# Altium PCB NBP-28 Rev 1.00.PCBDOC (part 5 of 6)
Units mil, origin at the board's own origin, x right, y up, seen from the top; angles counter-clockwise.
Board outline 2716.54 x 3917.15 mil, 8 copper layers (Top Layer, MidLayer3, MidLayer1, VCC, Gnd, VCCINT, MidLayer2, Bottom Layer), stack 59.043 mil thick; 229 components, 429 nets, 1584 pads, 1020 vias.
Unrouted connection lines stored in the file: 302.
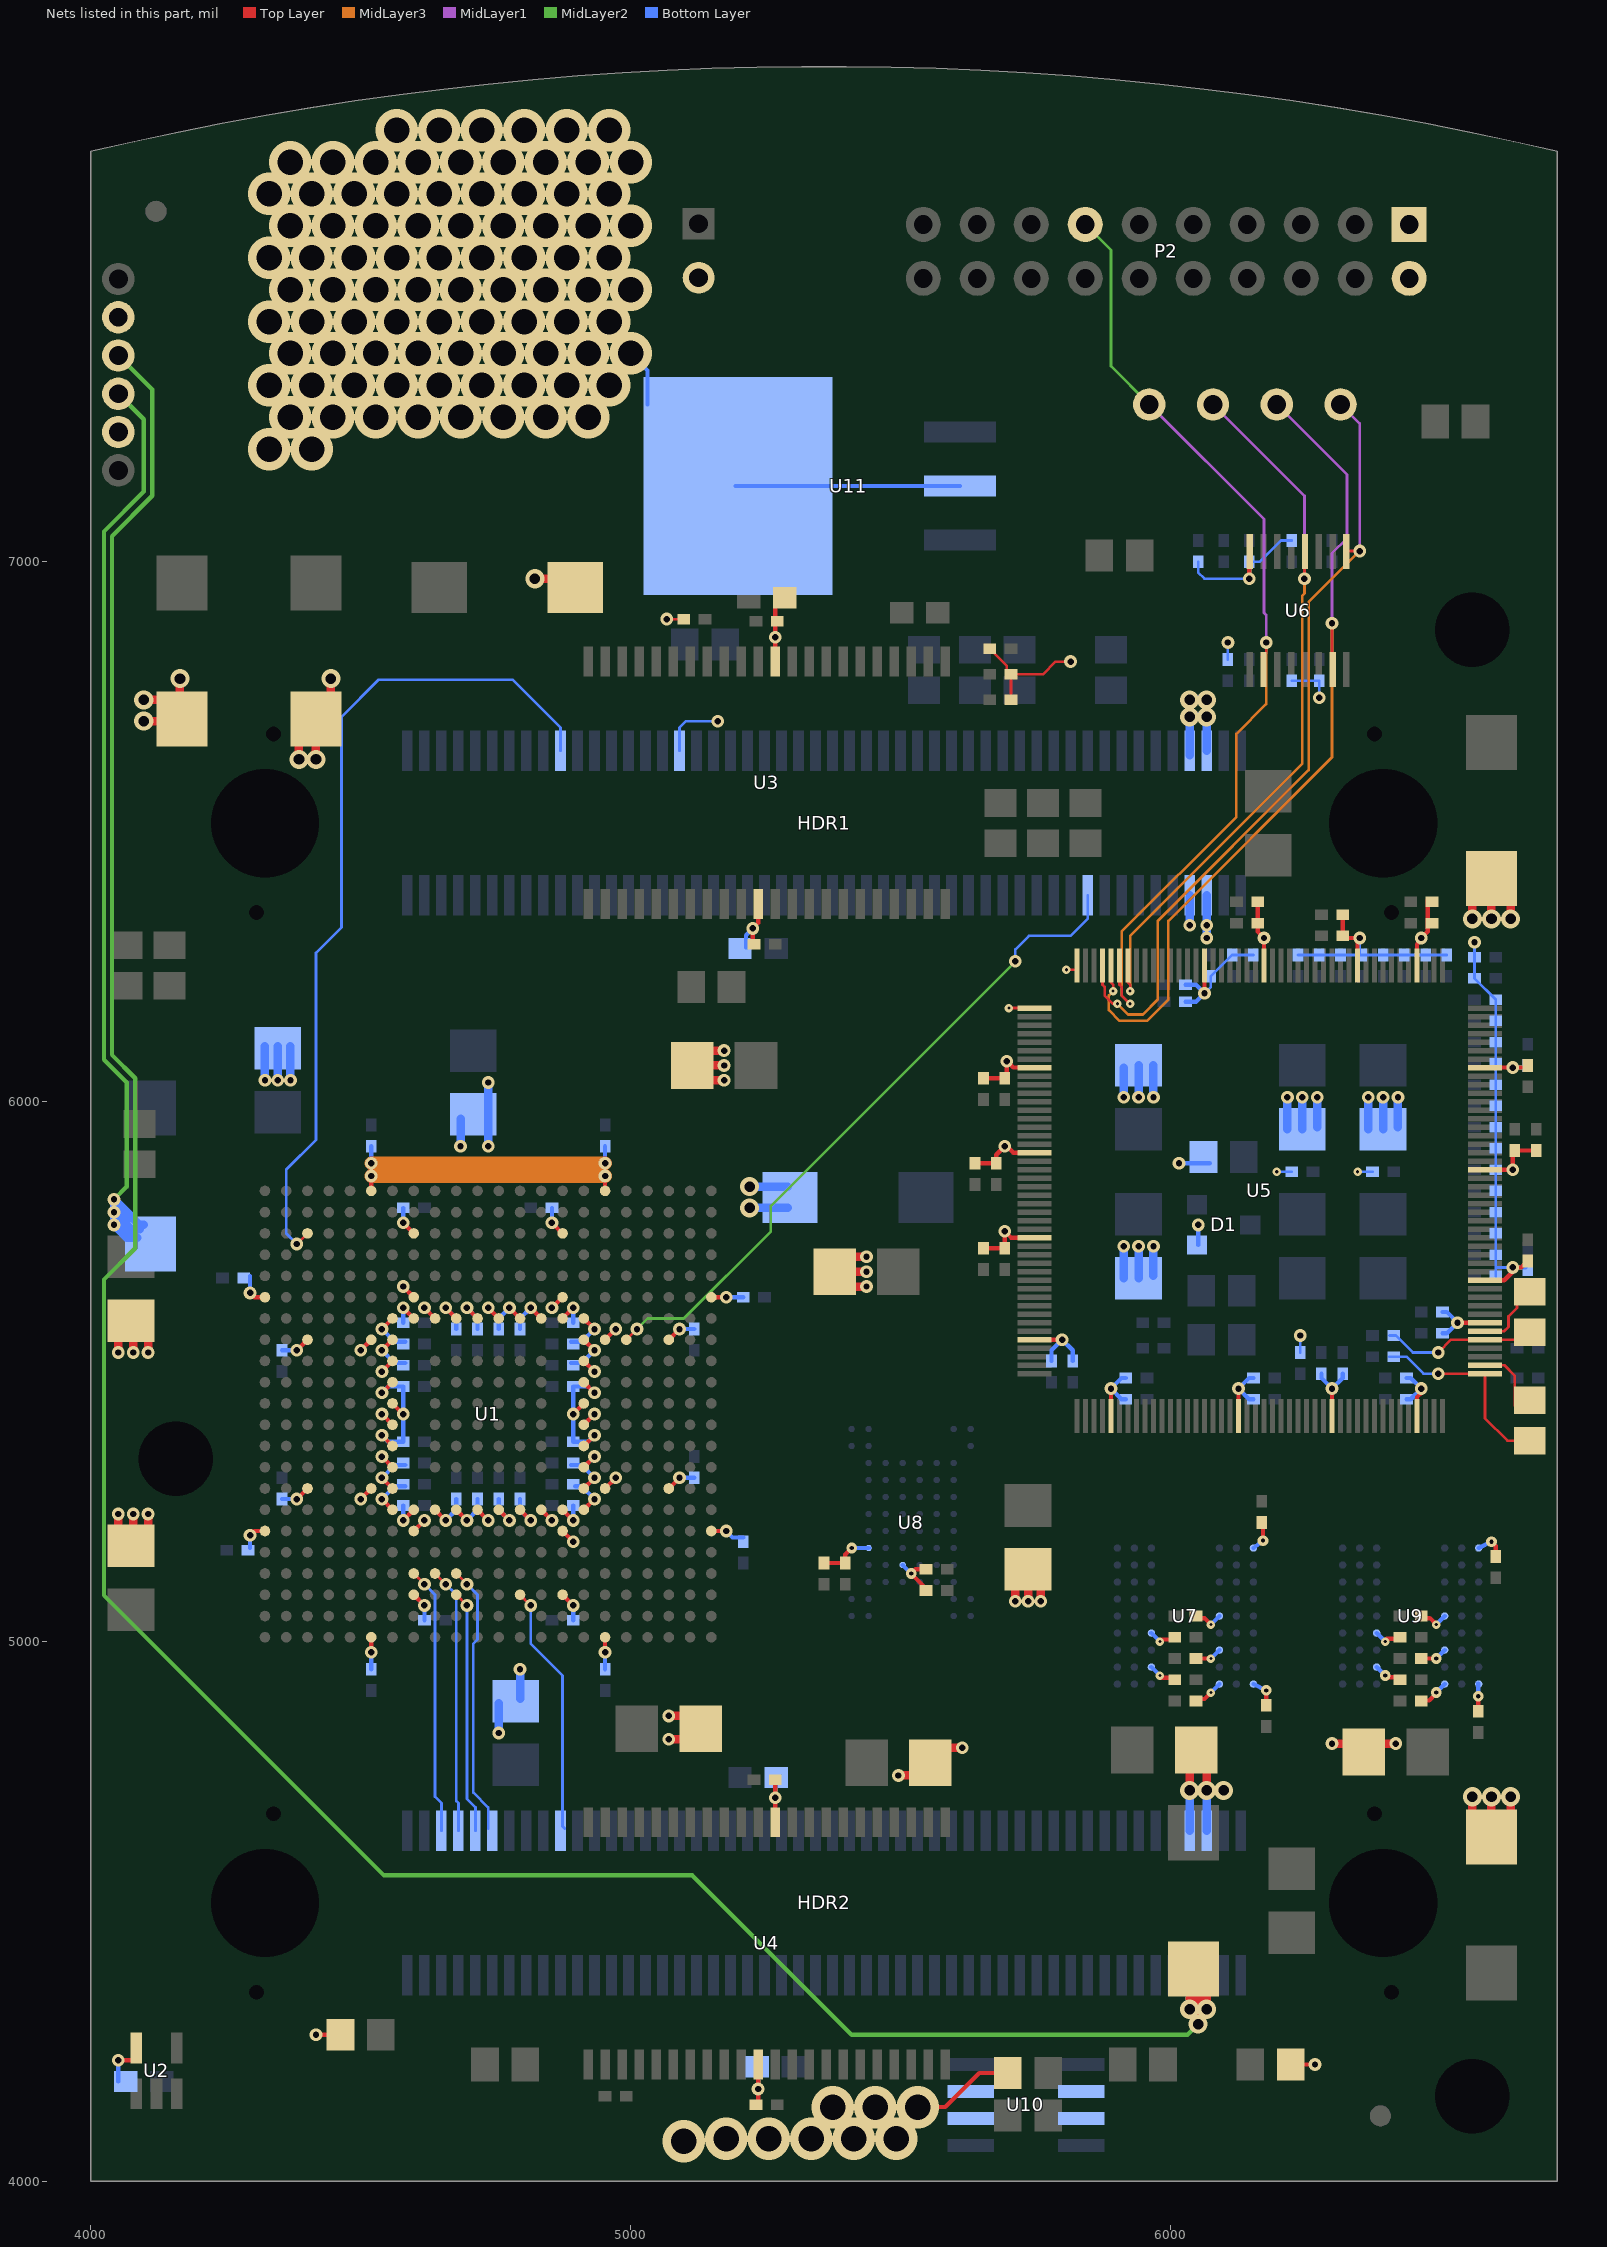
[diagram p11: the nets of this part, all layers, seen from the top]

## Via types
v1: diameter 23.62, hole 11.81, Top Layer to Bottom Layer, 614 vias
v2: diameter 15.75, hole 5.91, Top Layer to Bottom Layer, 214 vias
v3: diameter 78.74, hole 47.24, Top Layer to Bottom Layer, 101 vias
v4: diameter 35.43, hole 19.68, Top Layer to Bottom Layer, 59 vias
v5: diameter 19.68, hole 7.87, Top Layer to Bottom Layer, 32 vias

## Nets (pads, with @x,y where several pads share a name; then routed paths per layer and width w, separated by ;. In a path a pad name is that pad's centre, name@x,y a point inside that pad or via, vN(x,y) a via of type N, cw(c..) or ccw(c..) an arc to the next point about the centre after c; other vN are vias at no path point) (continued)
SWC3: HDR2.6 U1.W8 | length 497.6
  Top Layer w5: U1.W8@4598.43,5125.98 v1(4618.11,5106.3)
  Bottom Layer w5: v1(4618.11,5106.3) 4637.8,5086.61 4637.8,4712.6 4649.61,4700.79 HDR2.6@4649.61,4649.61
SWR0: HDR2.20 U1.Y13 | length 467.3
  Top Layer w5: U1.Y13@4795.28,5086.61 v1(4814.96,5066.93)
  Bottom Layer w5: v1(4814.96,5066.93) 4814.96,4996.06 4874.02,4937.01 4874.02,4657.48 4875.99,4655.51 HDR2.20@4877.95,4653.54
SWR1: HDR2.12 U1.W10 | length 503.4
  Top Layer w5: U1.W10@4677.17,5125.98 v1(4696.85,5106.3)
  Bottom Layer w5: v1(4696.85,5106.3) 4716.54,5086.61 4716.54,5003.94 4708.66,4996.06 4708.66,4720.47 4736.22,4692.91 HDR2.12@4736.22,4653.54
SWR2: HDR2.10 U1.Y10 | length 451.7
  Top Layer w5: U1.Y10@4677.17,5086.61 v1(4696.85,5066.93)
  Bottom Layer w5: v1(4696.85,5066.93) 4696.85,4708.66 4712.6,4692.91 HDR2.10@4712.6,4649.61
SWR3: HDR2.8 U1.W9 | length 494.3
  Top Layer w5: U1.W9@4637.8,5125.98 v1(4657.48,5106.3)
  Bottom Layer w5: v1(4657.48,5106.3) 4677.17,5086.61 4677.17,4704.72 4681.1,4700.79 HDR2.8@4681.1,4649.61
TCLK: TP4.1 U5.173 U6.9 | length 1476.8
  Top Layer w5: U5.173@5874.02,6251.97 5874.02,6216.53 5877.95,6212.6 5877.95,6196.85 5893.7,6181.1 v2(5901.58,6181.1) ; U6.9@6326.77,7019.69 v1(6350.4,7019.69)
  MidLayer1 w5: TP4.1@6314.96,7291.34 6350.4,7255.91 v1(6350.4,7019.69)
  MidLayer3 w5: v2(5901.58,6181.1) 5921.26,6161.42 5948.82,6161.42 5976.38,6188.98 5976.38,6334.65 6255.91,6614.17 6255.91,6925.2 v1(6350.4,7019.69)
TDI: TP6.1 U5.172 U6.7 | length 1600.1
  Top Layer w5: U5.172@5889.77,6251.97 5889.77,6220.47 5893.7,6216.54 v2(5893.7,6204.72) ; U6.7@6299.21,6801.18 v1(6299.21,6885.83)
  MidLayer1 w5: TP6.1@6196.85,7291.34 6326.77,7161.42 6326.77,7043.31 6299.21,7015.75 v1(6299.21,6885.83)
  MidLayer3 w5: v2(5893.7,6204.72) 5885.83,6196.85 5885.83,6169.29 5905.51,6149.61 5956.69,6149.61 5996.06,6188.98 5996.06,6334.65 6299.21,6637.8 v1(6299.21,6885.83)
TDO: P2.13 TP3.1 U5.171 U6.2 | length 1809.7
  Top Layer w5: U5.171@5905.51,6251.97 5905.51,6216.53 5909.45,6212.6 5909.45,6196.85 v2(5925.2,6181.1) ; U6.2@6169.29,6822.84 6177.17,6830.71 v1(6177.17,6850.39)
  MidLayer1 w5: TP3.1@5960.63,7291.34 6173.23,7078.74 6173.23,6905.51 6177.17,6901.58 v1(6177.17,6850.39)
  MidLayer2 w5: P2.13@5842.13,7624.8 5889.77,7577.17 5889.77,7362.21 TP3.1@5960.63,7291.34
  MidLayer3 w5: v2(5925.2,6181.1) 5909.45,6196.85 5909.45,6314.96 6122.05,6527.56 6122.05,6681.1 6177.17,6736.22 v1(6177.17,6850.39)
TEST: HDR1.81 U1.H18 | length 1261.2
  Top Layer w5: U1.H18@4992.13,5559.06 v1(5011.81,5578.74)
  MidLayer2 w5: v1(5011.81,5578.74) 5031.5,5598.43 5098.43,5598.43 5259.84,5759.84 5259.84,5807.09 v1(5712.6,6259.84)
  Bottom Layer w5: v1(5712.6,6259.84) 5712.6,6282.01 5737.57,6306.99 5814.86,6306.99 5846.46,6338.58 HDR1.81@5846.46,6381.89
TMS: TP5.1 U5.170 U6.12 | length 1388.5
  Top Layer w5: U5.170@5921.26,6251.97 5921.26,6220.47 5925.2,6216.54 v2(5925.2,6204.72) ; v1(6248.03,6968.5) U6.12@6248.03,7017.72
  MidLayer1 w5: TP5.1@6078.74,7291.34 6248.03,7122.05 v1(6248.03,6968.5)
  MidLayer3 w5: v2(5925.2,6204.72) 5925.2,6307.09 6244.1,6625.98 6244.1,6937.01 6248.03,6940.95 v1(6248.03,6968.5)
VCC1V2: C16.1 C17.1 C18.1 C19.1 C20.1 C21.1 C22.1 C23.1 C24.1 C25.1 C26.1 C27.1 C28.1 C29.1 C130.1 C131.1 TP9.1 U1.G7 U1.G8 U1.G15 U1.G16 U1.H7 U1.H16 U1.R7 U1.R16 U1.T7 U1.T8 U1.T15 U1.T16 U11.2 U11.4 | length 1927.8
  Top Layer w7.87: v1(4539.37,5263.78) U1.T7@4559.06,5244.09 ; v1(4539.37,5303.15) U1.R7@4559.06,5283.47 ; v1(4539.37,5539.37) U1.H7@4559.06,5559.06 ; v1(4539.37,5578.74) U1.G7@4559.06,5598.43 ; v1(4578.74,5224.41) U1.T8@4598.43,5244.09 ; v1(4578.74,5618.11) U1.G8@4598.43,5598.43 ; U1.T15@4874.02,5244.09 v1(4893.7,5224.41) ; U1.G15@4874.02,5598.43 v1(4893.7,5618.11) ; U1.T16@4913.39,5244.09 v1(4933.07,5263.78) ; U1.R16@4913.39,5283.47 v1(4933.07,5303.15) ; U1.H16@4913.39,5559.06 v1(4933.07,5539.37) ; U1.G16@4913.39,5598.43 v1(4933.07,5578.74)
  Top Layer w15.75: v4(4098.43,6704.72) 4169,6704.72 C130.1@4173.23,6704.72 ; v4(4098.43,6744.1) C130.1@4161.42,6744.1 ; C130.1@4165.36,6716.54 v4(4165.36,6783.47) ; v4(4822.84,6968.5) C131.1@4881.89,6968.5
  Bottom Layer w7.87: v1(4539.37,5263.78) 4562.99,5287.4 4578.74,5287.4 C20.1@4582.68,5287.4 ; v1(4539.37,5303.15) 4562.99,5326.77 4578.74,5326.77 C25.1@4582.68,5326.77 ; v1(4539.37,5539.37) 4562.99,5515.75 4578.74,5515.75 C23.1@4582.68,5515.75 ; v1(4539.37,5578.74) 4562.99,5555.12 4578.74,5555.12 C21.1@4582.68,5555.12 ; v1(4578.74,5224.41) C24.1@4578.74,5251.97 ; C22.1@4578.74,5590.55 v1(4578.74,5618.11) ; C27.1@4889.77,5326.77 4893.7,5326.77 4909.45,5326.77 v1(4933.07,5303.15) ; C29.1@4889.77,5515.75 4893.7,5515.75 4909.45,5515.75 v1(4933.07,5539.37) ; C19.1@4889.77,5555.12 4893.7,5555.12 4909.45,5555.12 v1(4933.07,5578.74) ; v1(4893.7,5224.41) C26.1@4893.7,5251.97 ; C28.1@4893.7,5590.55 v1(4893.7,5618.11) ; C18.1@4897.64,5287.4 4909.45,5287.4 v1(4933.07,5263.78) ; v3(5000,7385.83) 5031.5,7354.33 U11.4@5031.5,7291.34 ; U11.4@5194.49,7140.16 U11.4@5198.82,7140.16 U11.2@5610.24,7140.16
  Bottom Layer w15.75: v1(4685.04,5917.32) C17.1@4685.04,5968.5 ; v1(4736.22,5917.32) 4736.22,5976.38 v1(4736.22,6035.43) ; v1(4755.91,4830.71) C16.1@4755.91,4885.83 ; C16.1@4795.28,4893.7 v1(4795.28,4948.82)
  other v3: 4330.71,7208.66 4409.45,7208.66 4370.08,7267.72 4448.82,7267.72 4527.56,7267.72 4606.3,7267.72 4685.04,7267.72 4763.78,7267.72 4842.52,7267.72 4921.26,7267.72 4330.71,7326.77 4409.45,7326.77 4488.19,7326.77 4566.93,7326.77 4645.67,7326.77 4724.41,7326.77 4803.15,7326.77 4881.89,7326.77 4960.63,7326.77 4370.08,7385.83 4448.82,7385.83 4527.56,7385.83 4606.3,7385.83 4685.04,7385.83 4763.78,7385.83 4842.52,7385.83 4921.26,7385.83 4330.71,7444.88 4409.45,7444.88 4488.19,7444.88 4566.93,7444.88 4645.67,7444.88 4724.41,7444.88 4803.15,7444.88 4881.89,7444.88 4960.63,7444.88 4370.08,7503.94 4448.82,7503.94 4527.56,7503.94 4606.3,7503.94 4685.04,7503.94 4763.78,7503.94 4842.52,7503.94 4921.26,7503.94 5000,7503.94 4330.71,7562.99 4409.45,7562.99 4488.19,7562.99 4566.93,7562.99 4645.67,7562.99 4724.41,7562.99 4803.15,7562.99 4881.89,7562.99 4960.63,7562.99 4370.08,7622.05 4448.82,7622.05 4527.56,7622.05 4606.3,7622.05 4685.04,7622.05 4763.78,7622.05 4842.52,7622.05 4921.26,7622.05 5000,7622.05 4330.71,7681.1 4409.45,7681.1 4488.19,7681.1 4566.93,7681.1 4645.67,7681.1 4724.41,7681.1 4803.15,7681.1 4881.89,7681.1 4960.63,7681.1 4370.08,7740.16 4448.82,7740.16 4527.56,7740.16 4606.3,7740.16 4685.04,7740.16 4763.78,7740.16 4842.52,7740.16 4921.26,7740.16 5000,7740.16 4566.93,7799.21 4645.67,7799.21 4724.41,7799.21 4803.15,7799.21 4881.89,7799.21 4960.63,7799.21
VCC1V8: C88.1 C89.1 C90.1 C91.1 C92.1 C93.1 C94.1 C95.1 C96.1 C97.1 C98.1 C99.1 C100.1 C101.1 C132.1 C133.1 D1.1 HDR1.93 HDR1.95 HDR2.93 HDR2.95 R59.1 TP2.1 U5.40 U5.75 U5.95 U5.113 U5.136 U5.154 | length 6648
  Top Layer w7.87: U5.40@5748.03,5559.06 v1(5799.21,5559.06) ; C95.1@6161.42,6370.08 C96.1@6161.42,6330.71 6161.42,6314.96 v1(6173.23,6303.15) U5.154@6173.23,6251.97 ; U5.75@6299.21,5417.32 v1(6299.21,5468.5) ; U5.136@6456.69,6251.97 6456.69,6291.34 v1@6464.57,6299.21 ; v1(6464.57,6303.15) 6476.38,6314.96 6476.38,6330.71 6476.38,6370.08 C94.1@6476.38,6374.02 ; v1(6531.5,5590.55) U5.95@6582.68,5590.55 ; U5.113@6582.68,5874.02 v1(6633.86,5874.02) C101.1@6633.86,5905.51 ; C101.1@6637.8,5909.45 C93.1@6677.17,5909.45
  Top Layer w15.75: v4(6035.43,4318.9) C132.1@6035.43,4377.95 ; v4(6051.18,4291.34) 6051.18,4318.9 6051.18,4393.64 C132.1@6051.18,4393.7 ; v4(6066.93,4318.9) C132.1@6066.93,4389.76 ; v4(6559.06,6338.58) C133.1@6559.06,6401.58 ; v4(6594.49,6338.58) C133.1@6594.49,6397.64 ; v4(6629.92,6338.58) 6629.92,6413.32 C133.1@6629.92,6413.39
  MidLayer2 w7.87: TP2.1@4051.18,7381.89 4114.17,7318.9 4114.17,7122.05 4039.37,7047.24 4039.37,6086.61 4082.68,6043.31 4082.68,5728.35 4024.68,5670.35 4024.68,5085.55 4543.31,4566.93 5114.17,4566.93 5409.45,4271.65 6031.5,4271.65 v4(6051.18,4291.34)
  Bottom Layer w7.87: C97.1@5779.53,5519.69 5779.53,5539.37 v1(5799.21,5559.06) 5818.9,5539.37 C92.1@5818.9,5519.69 ; 6027.56,5885.83 6061.03,5885.83 R59.1@6072.84,5885.83 ; D1.1@6051.18,5734.25 v1(6051.18,5771.65) ; C98.1@6279.53,5496.06 6279.53,5488.19 v1(6299.21,5468.5) 6318.9,5488.19 C91.1@6318.9,5496.06 ; C99.1@6503.94,5570.87 6511.81,5570.87 v1(6531.5,5590.55) 6511.81,5610.24 C90.1@6503.94,5610.24
  Bottom Layer w15.75: C88.1@5913.39,5673.23 v1(5913.39,5732.28) ; C88.1@5940.95,5673.23 v1(5940.95,5732.28) ; C88.1@5968.51,5677.17 v1(5968.51,5732.28) ; v4(6035.43,4318.9) HDR2.93@6035.44,4381.89 ; v1(6035.43,6326.77) HDR1.93@6035.43,6381.89 ; v4(6066.93,4318.9) HDR2.95@6066.93,4381.89 ; v1(6066.93,6303.15) v1(6066.93,6326.77) HDR1.95@6066.93,6381.89 ; C89.1@6216.54,5948.82 v1(6216.54,6007.87) ; C89.1@6244.1,5948.82 v1(6244.1,6007.87) ; C89.1@6271.65,5952.76 v1(6271.65,6007.87)
  other v1: 6015.75,5885.83
VCC2V5: C2.1 C3.1 C4.1 C5.1 C6.1 C7.1 C8.1 C9.1 C10.1 C11.1 C128.1 C129.1 R64.1 TP7.1 U1.A6 U1.A17 U1.AB6 U1.AB17 U1.F1 U1.F22 U1.U1 U1.U22 U10.2 U10.3 U10.6 U10.7 | length 3938.9
  Top Layer w7.87: v1(4295.28,5196.85) 4303.15,5204.72 U1.U1@4322.84,5204.72 ; v1(4295.28,5645.67) 4303.15,5637.8 U1.F1@4322.84,5637.8 ; v1(4519.69,4980.32) U1.AB6@4519.69,5007.87 ; U1.A6@4519.69,5834.65 v1(4519.69,5862.21) v1(4519.69,5885.83) ; v1(4952.76,4980.32) U1.AB17@4952.76,5007.87 ; U1.A17@4952.76,5834.65 v1(4952.76,5862.21) v1(4952.76,5885.83) ; U1.U22@5149.61,5204.72 v1(5177.17,5204.72) ; U1.F22@5149.61,5637.8 v1(5177.17,5637.8) ; v3(5531.5,4137.8) 5582.68,4137.8 5645.67,4200.79 R64.1@5698.82,4200.79
  Top Layer w15.75: C3.1@4043.31,5173.23 4051.18,5177.17 v1(4051.18,5236.22) ; C3.1@4074.8,5173.23 4076.77,5175.2 4078.74,5177.17 v1(4078.74,5236.22) ; C3.1@4106.3,5173.23 4106.3,5177.17 v1(4106.3,5236.22) ; v1(5070.87,4818.9) C2.1@5129.92,4818.9 ; v1(5070.87,4862.21) C2.1@5125.99,4862.21
  MidLayer2 w7.87: v1(4043.31,5818.9) 4066.93,5842.52 4066.93,6035.43 4024.68,6077.68 4024.68,7056.18 4098.43,7129.92 4098.43,7263.78 TP7.1@4051.18,7311.02
  MidLayer3 w25.59: v1(4519.69,5862.21) v1(4952.76,5862.21) ; v1(4519.69,5885.83) v1(4952.76,5885.83)
  Bottom Layer w7.87: C11.1@4295.28,5173.23 v1(4295.28,5196.85) ; v1(4295.28,5645.67) 4295.28,5673.23 4295.28,5677.17 ; C10.1@4519.69,4948.82 v1(4519.69,4980.32) ; v1(4519.69,5862.21) v1(4519.69,5885.83) C4.1@4519.69,5917.32 ; C5.1@4952.76,4948.82 v1(4952.76,4980.32) ; v1(4952.76,5862.21) v1(4952.76,5885.83) C8.1@4952.76,5917.32 ; v1(5177.17,5204.72) 5188.98,5192.91 C7.1@5208.66,5192.91 ; v1(5177.17,5637.8) C6.1@5208.66,5637.8
  Bottom Layer w15.75: v1(4043.31,5771.65) 4066.93,5748.03 C128.1@4086.62,5748.03 ; C128.1@4066.93,5779.53 4047.25,5799.21 4043.31,5803.15 v1(4043.31,5818.9) 4055.12,5807.09 4090.55,5771.65 C128.1@4098.43,5771.65 ; C128.1@4070.87,5755.91 4049.21,5777.56 4043.31,5783.47 v1(4043.31,5795.28) 4055.12,5783.47 4074.8,5763.78 C128.1@4090.55,5763.78 ; v4(5220.47,5803.15) C129.1@5291.34,5803.15 ; v4(5220.47,5842.52) C129.1@5291.34,5842.52
  other v3: 5098.43,4074.8 5177.17,4078.74 5255.91,4078.74 5334.65,4078.74 5413.39,4078.74 5492.13,4078.74 5374.02,4137.8 5452.76,4137.8
VCC3V3: C1.2 C12.1 C13.1 C14.1 C15.1 C30.1 C31.1 C32.1 C33.1 C34.1 C35.1 C36.1 C37.1 C38.1 C39.1 C40.1 C41.1 C42.1 C43.1 C44.1 C45.1 C46.1 C47.1 C48.1 C49.1 C50.1 C51.1 C52.1 C53.1 C54.1 C55.1 C56.1 C57.1 C58.1 C62.1 C66.1 C67.1 C68.1 C69.1 C70.1 C71.1 C72.1 C73.1 C74.1 C75.1 C76.1 C77.1 C78.1 C79.1 C80.1 C81.1 C82.1 C83.1 C84.1 C85.1 C86.1 C87.1 C102.1 C103.1 C104.1 C105.1 C106.1 C107.1 C108.1 C109.1 C110.1 C111.1 C112.1 C113.1 C114.1 C115.1 C116.1 C117.1 C118.1 C119.1 C120.1 C121.1 C122.1 C126.1 C127.1 HDR1.34 HDR1.94 HDR1.96 HDR2.94 HDR2.96 P1.2 P2.1 P2.2 R1.1 R5.1 R15.2 R16.2 R17.2 R18.2 R20.2 R21.2 R22.2 R23.2 R24.2 R25.2 R26.2 R27.2 R28.2 R29.2 R30.2 R31.2 R32.2 R33.2 R34.2 R35.2 R39.2 R40.2 R41.2 R42.2 R43.2 R45.2 R48.2 R49.2 R50.2 R51.2 R52.2 R53.2 R54.2 R55.2 R56.2 R57.2 R61.1 R62.1 R67.1 TP1.1 U1.C8 U1.C15 U1.F8 U1.F15 U1.G9 U1.G10 U1.G11 U1.G12 U1.G13 U1.G14 U1.H3 U1.H6 U1.H17 U1.H20 U1.J7 U1.J16 U1.K7 U1.K16 U1.L7 U1.L16 U1.M7 U1.M16 U1.N7 U1.N16 U1.P7 U1.P16 U1.R3 U1.R6 U1.R17 U1.R20 U1.T9 U1.T10 U1.T11 U1.T12 U1.T13 U1.T14 U1.U8 U1.U15 U1.Y8 U1.Y15 U2.5 U3.11 U3.33 U4.11 U4.33 U5.1 U5.8 U5.18 U5.28 U5.49 U5.64 U5.85 U5.100 U5.125 U5.143 U5.161 U5.176 U6.16 U7.A7 U7.A9 U7.B3 U7.C7 U7.D3 U7.E7 U7.J9 U8.H7 U8.J5 U9.A7 U9.A9 U9.B3 U9.C7 U9.D3 U9.E7 U9.J9 | length 9463.7
  Top Layer w5: v1(5066.93,6893.7) R17.2@5098.43,6893.7 ; R24.2@5665.36,6838.58 5696.85,6807.09 R15.2@5696.85,6791.34 ; v2(5700.79,6173.23) U5.1@5748.03,6173.23 ; R18.2@5704.73,6744.1 R15.2@5704.73,6791.34 5763.78,6791.34 5787.4,6814.96 v1(5814.96,6814.96) ; v2(5807.09,6244.1) U5.176@5826.77,6244.1
  Top Layer w7.87: v1(4051.18,4224.41) 4084.65,4224.41 U2.5@4090.55,4224.41 ; v1(4381.89,5263.78) U1.R3@4401.58,5283.47 ; v1(4381.89,5539.37) U1.H3@4401.58,5559.06 ; v1(4417.32,4271.65) R16.2@4462.6,4271.65 ; v1(4500,5263.78) U1.R6@4519.69,5283.47 ; v1(4500,5539.37) U1.H6@4519.69,5559.06 ; v1(4539.37,5342.52) U1.P7@4559.06,5322.84 ; v1(4539.37,5381.89) U1.N7@4559.06,5362.21 ; v1(4539.37,5421.26) U1.M7@4559.06,5401.58 ; v1(4539.37,5460.63) U1.K7@4559.06,5480.32 ; v1(4539.37,5500) U1.J7@4559.06,5519.69 ; U1.L7@4559.06,5440.95 v1(4578.74,5421.26) ; v1(4578.74,5657.48) U1.F8@4598.43,5637.8 ; v1(4578.74,5775.59) U1.C8@4598.43,5755.91 ; U1.Y8@4598.43,5086.61 v1(4618.11,5066.93) ; U1.U8@4598.43,5204.72 v1(4618.11,5224.41) ; v1(4618.11,5618.11) U1.G9@4637.8,5598.43 ; U1.T9@4637.8,5244.09 v1(4657.48,5224.41) ; v1(4657.48,5618.11) U1.G10@4677.17,5598.43 ; U1.T10@4677.17,5244.09 v1(4696.85,5224.41) ; v1(4696.85,5618.11) U1.G11@4716.54,5598.43 ; U1.T11@4716.54,5244.09 v1(4736.22,5224.41) ; v1(4736.22,5618.11) U1.G12@4755.91,5598.43 ; U1.T12@4755.91,5244.09 v1(4775.59,5224.41) ; v1(4775.59,5618.11) U1.G13@4795.28,5598.43 ; U1.T13@4795.28,5244.09 v1(4814.96,5224.41) ; v1(4814.96,5618.11) U1.G14@4834.65,5598.43 ; U1.T14@4834.65,5244.09 v1(4854.33,5224.41) ; v1(4854.33,5618.11) U1.F15@4874.02,5637.8 ; v1(4854.33,5775.59) U1.C15@4874.02,5755.91 ; U1.Y15@4874.02,5086.61 v1(4893.7,5066.93) ; U1.U15@4874.02,5204.72 v1(4893.7,5185.04) ; v1(4893.7,5421.26) U1.L16@4913.39,5440.95 ; U1.P16@4913.39,5322.84 v1(4933.07,5342.52) ; U1.N16@4913.39,5362.21 v1(4933.07,5381.89) ; U1.M16@4913.39,5401.58 v1(4933.07,5421.26) ; U1.K16@4913.39,5480.32 v1(4933.07,5460.63) ; U1.J16@4913.39,5519.69 v1(4933.07,5500) ; U1.R17@4952.76,5283.47 v1@4972.44,5303.15 ; U1.H17@4952.76,5559.06 v1(4972.44,5578.74) ; U1.R20@5070.87,5283.47 v1(5090.55,5303.15) ; U1.H20@5070.87,5559.06 v1(5090.55,5578.74) ; C53.1@5228.35,6291.34 5226.38,6293.31 v1(5226.38,6320.87) 5236.22,6330.71 U3.11@5236.22,6366.14 ; C58.1@5236.22,4145.67 v1(5236.22,4171.26) U4.11@5236.22,4216.54 U4.11@5236.22,4221.46 ; U4.33@5267.72,4660.43 U4.33@5267.72,4665.35 v1(5267.72,4710.63) C57.1@5267.72,4744.1 ; U3.33@5267.72,6810.04 U3.33@5267.72,6814.96 v1(5267.72,6860.24) 5267.72,6889.76 5267.72,6933.07 C51.1@5267.72,6944.88 ; C105.1@5358.27,5145.67 C104.1@5397.64,5145.67 5397.64,5161.42 v5(5409.45,5173.23) ; C103.1@5547.25,5094.49 5547.25,5098.43 v5(5519.69,5125.98) 5527.56,5133.86 C106.1@5547.25,5133.86 ; C71.1@5637.8,5885.83 C81.1@5677.17,5885.83 5677.17,5901.58 v1(5692.91,5917.32) 5696.85,5917.32 5708.66,5905.51 U5.18@5748.03,5905.51 ; C70.1@5653.54,5728.35 C80.1@5692.91,5728.35 v1(5692.91,5759.84) 5704.73,5748.03 U5.28@5748.03,5748.03 ; C68.1@5653.54,6043.31 C78.1@5692.91,6043.31 ; C78.1@5696.85,6047.24 v1(5696.85,6074.8) 5708.66,6062.99 U5.8@5748.03,6062.99 ; U5.49@5889.77,5417.32 v1(5889.77,5468.5) ; v2(5980.32,4937.01) 5984.25,4933.07 6007.88,4933.07 C119.1@6011.81,4933.07 ; v2(5980.32,5000) 5984.25,5003.94 C121.1@6003.94,5003.94 ; C120.1@6043.31,4893.7 6047.25,4893.7 6062.99,4893.7 v2(6074.8,4905.51) ; C109.1@6043.31,5043.31 6047.25,5043.31 6062.99,5043.31 v2(6074.8,5031.5) ; C118.1@6047.25,4968.5 v2(6074.8,4968.5) ; v1(6062.99,6200.79) U5.161@6062.99,6251.97 ; U5.64@6125.99,5417.32 v1(6125.99,5468.5) ; v1(6145.67,6968.5) U6.16@6145.67,7017.72 ; v5(6171.26,5187.01) C122.1@6171.26,5218.5 ; C108.1@6177.17,4885.83 v5(6177.17,4909.45) ; R5.1@6222.44,4216.54 v1(6267.72,4216.54) ; C86.1@6318.9,6307.09 C76.1@6318.9,6346.46 ; C86.1@6322.84,6303.15 v1(6350.4,6303.15) ; U5.143@6346.46,6251.97 v1@6346.46,6299.21 ; v5@6396.65,4938.01 v5(6397.64,4937.01) 6400.58,4934.07 6425.2,4934.07 C115.1@6428.14,4934.07 ; v2@6396.64,5001 6400.58,5004.94 C116.1@6420.27,5004.94 ; U5.85@6456.69,5417.32 6456.69,5452.76 6464.57,5460.63 v1(6464.57,5468.5) ; C117.1@6459.64,4890.76 6464.57,4890.76 6479.32,4890.76 v5@6491.14,4902.58 ; C107.1@6460.63,5043.31 6464.57,5043.31 6480.32,5043.31 v2(6492.13,5031.5) ; C112.1@6464.57,4968.5 v5(6492.13,4968.5) ; C114.1@6569.88,4871.08 v5(6569.88,4898.64) ; U5.100@6582.68,5669.29 6618.11,5669.29 6633.86,5685.04 v1(6633.86,5692.91) 6649.61,5692.91 C84.1@6661.42,5704.72 ; U5.125@6582.68,6062.99 v1(6633.86,6062.99) C75.1@6657.48,6062.99 ; v5(6594.49,5185.04) 6602.36,5177.17 C113.1@6602.36,5157.48
  Top Layer w15.75: C32.1@4043.31,5598.43 4051.18,5594.49 v1(4051.18,5535.43) ; C32.1@4074.8,5598.43 4076.77,5596.46 4078.74,5594.49 v1(4078.74,5535.43) ; v1(4106.3,5535.43) 4106.3,5594.49 C32.1@4106.3,5598.43 ; v4(4385.83,6633.86) C127.1@4385.83,6696.85 ; v4(4417.32,6633.86) C127.1@4417.32,6692.91 ; C127.1@4444.88,6720.47 v4(4444.88,6783.47) ; C49.1@5110.24,6039.37 5114.17,6039.37 v1(5173.23,6039.37) ; C49.1@5110.24,6094.49 5114.17,6094.49 v1(5173.23,6094.49) ; C49.1@5114.17,6066.93 v1(5173.23,6066.93) ; C31.1@5374.02,5657.48 5377.95,5657.48 v1(5437.01,5657.48) ; C31.1@5374.02,5712.6 5377.95,5712.6 v1(5437.01,5712.6) ; C31.1@5377.95,5685.04 v1(5437.01,5685.04) ; v1(5496.06,4751.97) C50.1@5547.25,4751.97 ; C50.1@5551.18,4803.15 5555.12,4803.15 v1(5614.17,4803.15) ; v1(5712.6,5074.8) C102.1@5712.6,5118.11 ; v1(5736.22,5074.8) C102.1@5736.22,5125.98 ; v1(5759.84,5074.8) C102.1@5759.84,5122.05 ; v4(6035.43,4724.41) C110.1@6035.43,4783.47 ; C110.1@6047.25,4799.21 6066.93,4779.53 v4(6066.93,4724.41) ; v1(6299.21,4811.02) 6358.27,4811.02 v1(6417.32,4811.02) ; C126.1@6559.06,4669.29 v4(6559.06,4712.6) ; C126.1@6594.49,4637.8 6594.49,4637.86 v4(6594.49,4712.6) ; C126.1@6629.92,4653.54 v4(6629.92,4712.6)
  Bottom Layer w5: HDR1.34@5090.55,6649.61 5090.55,6692.91 5102.36,6704.72 v1(5161.42,6704.72) ; R67.1@6051.18,7000 6051.18,6980.32 6062.99,6968.5 v1(6145.67,6968.5) ; v1(6062.99,6200.79) 6074.8,6212.6 R56.2@6074.8,6232.28 R55.2@6114.17,6271.65 R54.2@6153.54,6271.65 ; R57.2@6106.3,6818.9 v1(6106.3,6850.39) ; C62.1@6145.67,7000 6165.36,7000 6204.73,7039.37 R62.1@6224.41,7039.37 ; v2(6196.85,5870.08) R29.2@6224.41,5870.08 ; R1.1@6224.41,6779.53 R61.1@6275.59,6779.53 v1(6275.59,6748.03) ; R52.2@6236.22,6271.65 R53.2@6275.59,6271.65 R50.2@6314.96,6271.65 R51.2@6350.4,6271.65 ; R20.2@6240.16,5535.43 v1(6240.16,5566.93) ; v2(6346.46,5870.08) R30.2@6374.02,5870.08 ; v1(6350.4,6303.15) R51.2@6350.4,6271.65 ; R41.2@6511.81,6271.65 R42.2@6472.44,6271.65 R43.2@6433.07,6271.65 R45.2@6393.7,6271.65 R51.2@6354.33,6271.65 R51.2@6350.4,6271.65 ; v1(6562.99,6295.28) R49.2@6562.99,6267.72 R40.2@6562.99,6228.35 R48.2@6602.36,6188.98 R39.2@6602.36,6149.61 R25.2@6602.36,6110.24 R26.2@6602.36,6070.87 R27.2@6602.36,6031.5 R28.2@6602.36,5992.13 R31.2@6602.36,5952.76 R32.2@6602.36,5913.39 R35.2@6602.36,5874.02 R33.2@6602.36,5834.65 R34.2@6602.36,5795.28 R21.2@6602.36,5755.91 R22.2@6602.36,5716.54 6602.36,5692.91 ; R23.2@6602.36,5677.17 6602.36,5692.91 ; R26.2@6606.3,6062.99 v1(6633.86,6062.99) ; v1(6633.86,5692.91) 6602.36,5692.91
  Bottom Layer w7.87: C1.2@4051.18,4185.04 v1(4051.18,4224.41) ; C15.1@4354.33,5263.78 v1(4381.89,5263.78) ; C47.1@4354.33,5539.37 v1(4381.89,5539.37) ; v1(4539.37,5381.89) 4551.18,5370.08 C33.1@4578.74,5370.08 v1(4578.74,5421.26) C40.1@4578.74,5472.44 4551.18,5472.44 v1(4539.37,5460.63) ; v1(4578.74,5775.59) C14.1@4578.74,5803.15 ; C48.1@4618.11,5039.37 v1(4618.11,5066.93) ; v1(4657.48,5224.41) 4677.17,5244.1 C36.1@4677.17,5263.78 ; v1(4657.48,5618.11) 4677.17,5598.43 C39.1@4677.17,5578.74 ; v1(4696.85,5224.41) 4716.54,5244.1 C44.1@4716.54,5263.78 ; v1(4696.85,5618.11) 4716.54,5598.43 C41.1@4716.54,5578.74 ; C34.1@4755.91,5263.78 4755.91,5244.1 v1(4775.59,5224.41) ; C37.1@4755.91,5578.74 4755.91,5598.43 v1(4775.59,5618.11) ; C43.1@4795.28,5263.78 4795.28,5244.1 v1(4814.96,5224.41) ; C35.1@4795.28,5578.74 4795.28,5598.43 v1(4814.96,5618.11) ; v1(4854.33,5775.59) C46.1@4854.33,5803.15 ; C13.1@4893.7,5039.37 v1(4893.7,5066.93) ; v1(4933.07,5381.89) 4921.26,5370.08 C38.1@4893.7,5370.08 v1(4893.7,5421.26) C42.1@4893.7,5472.44 4921.26,5472.44 v1(4933.07,5460.63) ; v1(5090.55,5303.15) C45.1@5118.11,5303.15 ; v1(5090.55,5578.74) C12.1@5118.11,5578.74 ; C52.1@5213.58,6285.43 5213.58,6308.07 v1(5226.38,6320.87) ; v1@5236.22,4172.24 C55.1@5236.22,4210.63 ; v1(5267.72,4710.63) C56.1@5267.72,4748.03 ; v5(5409.45,5173.23) U8.H7@5440.95,5173.23 ; U8.J5@5503.94,5141.73 v5(5519.69,5125.98) ; C79.1@5917.32,5448.82 5909.45,5448.82 v1(5889.77,5468.5) 5909.45,5488.19 C69.1@5917.32,5488.19 ; U7.B3@5964.57,4952.76 v2(5980.32,4937.01) ; U7.D3@5964.57,5015.75 v2(5980.32,5000) ; C87.1@6027.56,6185.04 6047.25,6185.04 v1(6062.99,6200.79) 6047.25,6216.54 C77.1@6027.56,6216.54 ; v2(6074.8,4905.51) U7.A7@6090.55,4921.26 ; v2(6074.8,4968.5) U7.C7@6090.55,4984.25 ; v2(6074.8,5031.5) U7.E7@6090.55,5047.24 ; v1(6145.67,6968.5) C62.1@6145.67,7000 ; U7.A9@6153.54,4921.26 v5(6177.17,4909.45) ; U7.J9@6153.54,5173.23 v5(6171.26,5187.01) ; C83.1@6153.54,5448.82 6145.67,5448.82 v1(6125.99,5468.5) 6145.67,5488.19 C73.1@6153.54,5488.19 ; U9.B3@6381.89,4952.76 v5(6397.64,4937.01) ; U9.D3@6381.89,5015.75 v2(6397.64,5000) ; C82.1@6437.01,5448.82 6444.88,5448.82 v1(6464.57,5468.5) 6444.88,5488.19 C72.1@6437.01,5488.19 ; v5(6492.13,4905.51) U9.A7@6507.88,4921.26 ; v5(6492.13,4968.5) U9.C7@6507.88,4984.25 ; v2(6492.13,5031.5) U9.E7@6507.88,5047.24 ; v5(6569.88,4898.64) 6569.88,4921.26 U9.A9@6569.88,4922.26 ; U9.J9@6570.87,5173.23 v5(6594.49,5185.04) ; v1(6633.86,5692.91) C74.1@6657.48,5692.91 ; v1(6633.86,6062.99) C85.1@6657.48,6062.99
  Bottom Layer w15.75: v1(4322.84,6039.37) 4322.84,6098.43 C30.1@4322.84,6102.36 ; v1(4346.46,6039.37) C30.1@4346.46,6098.43 C30.1@4346.46,6102.36 ; v1(4370.08,6039.37) 4370.08,6098.43 C30.1@4370.08,6102.36 ; v1(5913.39,6007.87) C67.1@5913.39,6062.99 ; v1(5940.95,6007.87) C67.1@5940.95,6066.93 ; v1(5968.51,6007.87) C67.1@5968.51,6066.93 ; HDR2.94@6035.44,4649.61 v4(6035.43,4724.41) v4(6066.93,4724.41) ; HDR1.94@6035.43,6641.73 HDR1.94@6035.43,6649.61 v4(6035.43,6712.6) ; HDR2.96@6066.93,4649.61 v4(6066.93,4724.41) ; HDR1.96@6066.93,6649.61 v4(6066.93,6712.6) ; v4(6098.43,4724.41) v4(6066.93,4724.41) ; C66.1@6366.14,5948.82 v1(6366.14,6007.87) ; C66.1@6393.7,5948.82 v1(6393.7,6007.87) ; C66.1@6421.26,5952.76 v1(6421.26,6007.87) ; v4(6035.43,6712.6) v4(6066.93,6712.6) ; v4(6035.43,6712.6) v4(6035.43,6744.1) v4(6066.93,6744.1) v4(6066.93,6712.6)
  other v1: 4972.44,5303.15
VDRIVE: HDR1.20 U1.C3 | length 1568.9
  Top Layer w5: v1(4381.89,5736.22) U1.C3@4401.58,5755.91
  Bottom Layer w5: v1(4381.89,5736.22) 4362.21,5755.91 4362.21,5874.02 4417.32,5929.13 4417.32,6275.59 4464.62,6322.88 4464.62,6712.61 4533.62,6781.61 4781.38,6781.61 4870.08,6692.91 HDR1.20@4870.08,6649.61
XTALIN: C59.2 R38.1 U5.93 | length 278.7
  Top Layer w5: v1(6496.06,5535.43) 6519.69,5559.06 U5.93@6582.68,5559.06 R38.1@6661.42,5559.06
  Bottom Layer w5: C59.2@6405.51,5566.93 C59.2@6413.39,5566.93 6417.32,5566.93 6448.82,5535.43 v1(6496.06,5535.43)
XTALIN_32K: C60.2 R47.1 U5.89 | length 372.7
  Top Layer w5: v1(6496.06,5496.06) U5.89@6582.68,5496.06 6582.68,5413.39 6624.02,5372.05 R47.1@6665.36,5372.05
  Bottom Layer w5: C60.2@6405.51,5527.56 C60.2@6413.39,5527.56 6437.01,5527.56 6468.51,5496.06 v1(6496.06,5496.06)
XTALOUT: R38.2 U5.94 | length 108.2
  Top Layer w5: U5.94@6582.68,5574.8 6618.11,5574.8 6625.99,5582.68 6625.99,5602.36 6641.73,5618.11 R38.2@6641.73,5637.8
XTALOUT_32K: R47.2 U5.90 | length 118.4
  Top Layer w5: U5.90@6582.68,5511.81 6618.11,5511.81 6637.8,5492.13 6637.8,5446.85 R47.2@6637.8,5437.01
pads on no net: D1.2 HDR1.91 HDR1.MH1 HDR1.MH2 HDR1.MH3 HDR1.MH4 HDR1.MH5 HDR1.MH6 HDR2.MH1 HDR2.MH2 HDR2.MH3 HDR2.MH4 HDR2.MH5 HDR2.MH6 U2.1 U5.145 U5.157 U5.162 U7.E2 U8.A1 U8.A2 U8.A7 U8.A8 U8.B1 U8.B7 U8.B8 U8.L1 U8.L2 U8.L7 U8.L8 U8.M1 U8.M2 U8.M7 U8.M8 U9.E2 U10.5 U10.8

## Polygon pours and split planes (outlines as drawn)
VCC1V2 on Top Layer "Top Layer-VCC1V2" (solid, remove dead copper, pour order 1001): 3909.45,7980.32 6889.77,7980.32 6889.77,6141.73 3913.39,6141.73
GND on Top Layer "Top Layer-GND" (solid, remove dead copper, pour order 1000): 3885.83,6881.89 6885.83,6881.89 6885.83,3881.89 3885.83,3881.89
VCC3V3 on MidLayer1 "MidLayer1-VCC3V3" (solid, remove dead copper, pour order 1002): 3913.39,8015.75 6838.58,8015.75 6838.58,3858.27 3913.39,3858.27
VCC1V8 on MidLayer2 "MidLayer2-VCC1V8" (solid, remove dead copper, pour order 1004): 5759.84,3870.08 5759.84,8027.56 6791.34,8027.56 6791.34,3866.14
GND on MidLayer2 "MidLayer2-GND" (solid, remove dead copper, pour order 1003): 3897.64,7992.13 6791.34,7992.13 6791.34,3917.32 3897.64,3917.32
VCC2V5 on MidLayer3 "MidLayer3-VCC2V5" (solid, remove dead copper, pour order 1006): 5374.02,8007.87 5374.02,6858.27 5472.44,6759.84 5472.44,4350.39 5669.29,4153.54 5669.29,3846.46 3909.45,3846.46 3909.45,8007.87
+5V on MidLayer3 "MidLayer3-+5V" (solid, remove dead copper, pour order 1005): 5342.52,8035.43 5342.52,3901.58 6814.96,3901.58 6814.96,8031.5
+5V on Bottom Layer "Bottom Layer-+5V" (solid, remove dead copper, pour order 1010): 6429.14,4515.75 5759.61,4515.75 5759.61,4181.1 5968.51,4181.1 6023.62,4125.98 6389.77,4125.98 6389.77,3952.76 6795.28,3952.76 6795.28,4515.75
VCC2V5 on Bottom Layer "Bottom Layer-VCC2V5" (solid, remove dead copper, pour order 1009): 4976.38,3956.69 4976.38,4409.45 6401.58,4409.45 6401.58,3925.2 4976.38,3925.2
VCC1V2 on Bottom Layer "Bottom Layer-VCC1V2" (solid, remove dead copper, pour order 1008): 3874.02,8000 3874.02,6511.81 6854.33,6511.81 6854.33,8003.94
GND on Bottom Layer "Bottom Layer-GND" (solid, remove dead copper, pour order 1007): 3972.44,6570.87 6870.08,6570.87 6870.08,3937.01 3972.44,3937.01
VCC3V3 on VCC (split plane): 5426.61,7896.9 5494.94,7895.72 5563.25,7893.75 5631.54,7890.98 5699.78,7887.43 5767.99,7883.1 5836.14,7877.97 5904.22,7872.06 5972.23,7865.36 6040.16,7857.87 6108,7849.61 6175.74,7840.56 6243.37,7830.72 6310.88,7820.11 6378.27,7808.72 6445.51,7796.55 6512.62,7783.6 6579.57,7769.88 6646.35,7755.39 6696.44,7743.92 6696.44,4020.1 4020.1,4020.1 4020.12,7743.92 4070.18,7755.39 4136.97,7769.88 4203.92,7783.6 4271.02,7796.55 4338.27,7808.72 4405.65,7820.11 4473.17,7830.72 4540.8,7840.56 4608.53,7849.61 4676.37,7857.87 4744.3,7865.36 4812.32,7872.06 4880.4,7877.97 4948.55,7883.1 5016.75,7887.43 5085,7890.98 5153.28,7893.75 5221.6,7895.72 5289.93,7896.9 5358.27,7897.3
GND on Gnd (split plane): 5426.61,7896.9 5494.94,7895.72 5563.25,7893.75 5631.54,7890.98 5699.78,7887.43 5767.99,7883.1 5836.14,7877.97 5904.22,7872.06 5972.23,7865.36 6040.16,7857.87 6108,7849.61 6175.74,7840.56 6243.37,7830.72 6310.88,7820.11 6378.27,7808.72 6445.51,7796.55 6512.62,7783.6 6579.57,7769.88 6646.35,7755.39 6696.44,7743.92 6696.44,4020.1 4020.1,4020.1 4020.12,7743.92 4070.18,7755.39 4136.97,7769.88 4203.92,7783.6 4271.02,7796.55 4338.27,7808.72 4405.65,7820.11 4473.17,7830.72 4540.8,7840.56 4608.53,7849.61 4676.37,7857.87 4744.3,7865.36 4812.32,7872.06 4880.4,7877.97 4948.55,7883.1 5016.75,7887.43 5085,7890.98 5153.28,7893.75 5221.6,7895.72 5289.93,7896.9 5358.27,7897.3
VCC1V2 on VCCINT (split plane): 161 vertices, not listed, extent 4020.11,4340.6 6696.44,7897.3
VCC2V5 on VCCINT (split plane): 5265.7,5248.03 5265.9,5246.49 5266.5,5245.05 5267.44,5243.82 5423.18,5088.08 5423.18,4334.65 5423.38,4333.1 5423.98,4331.67 5424.92,4330.43 5426.16,4329.49 5427.59,4328.89 5429.14,4328.69 5667.27,4328.69 5667.27,4020.1 4020.1,4020.1 4020.11,5950.74 4541.29,5950.74 4541.29,5840.6 4393.7,5840.6 4393.65,5840.6 4393.6,5840.6 4392.88,5840.49 4392.16,5840.4 4392.11,5840.38 4392.06,5840.37 4391.4,5840.08 4390.72,5839.8 4390.68,5839.77 4390.64,5839.75 4370.95,5827.94 4369.73,5826.98 4368.81,5825.73 4368.24,5824.28 4368.06,5822.73 4368.29,5821.2 4368.91,5819.77 4369.57,5818.94 4338.31,5787.68 4337.36,5786.44 4337.12,5785.85 4336.77,5785.01 4336.56,5783.47 4336.56,5775.59 4336.77,5774.05 4337.12,5773.21 4337.36,5772.61 4338.31,5771.38 4375.93,5733.75 4375.93,5108.77 4346.18,5079.02 4345.24,5077.78 4344.99,5077.19 4344.64,5076.35 4344.44,5074.8 4344.44,5003.94 4344.64,5002.4 4345.24,5000.96 4346.18,4999.73 4347.42,4998.78 4348.85,4998.18 4350.4,4997.98 4615.64,4997.98 4694.83,4918.79 4694.83,4795.28 4695.04,4793.73 4695.63,4792.3 4696.58,4791.06 4697.81,4790.12 4699.25,4789.52 4700.79,4789.32 4885.83,4789.32 4887.37,4789.52 4888.81,4790.12 4890.04,4791.06 4890.99,4792.3 4891.58,4793.73 4891.78,4795.28 4891.78,4958.16 4931.6,4997.98 5114.17,4997.98 5115.72,4998.18 5117.15,4998.78 5118.39,4999.73 5119.33,5000.96 5119.93,5002.4 5120.13,5003.94 5120.13,5082.68 5119.93,5084.22 5119.33,5085.66 5118.39,5086.89 5096.51,5108.77 5096.51,5733.75 5134.13,5771.38 5135.08,5772.61 5135.26,5773.03 5135.68,5774.05 5135.88,5775.59 5135.88,5791.34 5135.68,5792.88 5135.33,5793.72 5135.08,5794.32 5134.13,5795.55 5090.83,5838.86 5089.59,5839.8 5088.16,5840.4 5086.62,5840.6 4931.15,5840.6 4931.15,5950.74 5265.7,5950.74
+5V on VCCINT (split plane): 6696.44,6655.56 6618.11,6655.56 6616.57,6655.36 6615.13,6654.77 6613.9,6653.82 6296.75,6336.67 6112.7,6336.67 6086.89,6362.48 6085.66,6363.43 6084.22,6364.02 6082.68,6364.22 6023.62,6364.22 6022.08,6364.02 6020.65,6363.43 6019.41,6362.48 5755.63,6098.7 5754.69,6097.47 5754.09,6096.03 5753.89,6094.49 5753.89,5531.5 5754.09,5529.95 5754.44,5529.11 5754.69,5528.52 5755.63,5527.28 5934.99,5347.93 5934.99,5326.77 5934.99,4322.84 5935.19,4321.29 5935.54,4320.45 5935.79,4319.86 5936.73,4318.62 5991.85,4263.51 5993.09,4262.56 5994.52,4261.96 5996.06,4261.76 5996.07,4261.76 6098.43,4261.76 6099.97,4261.96 6101.4,4262.56 6102.64,4263.51 6103.59,4264.74 6104.18,4266.18 6104.38,4267.72 6104.38,4406.98 6140.26,4442.86 6696.44,4442.86 6696.44,4020.1 5679.19,4020.1 5679.19,5220.47 5678.98,5222.01 5678.63,5222.86 5678.39,5223.45 5677.44,5224.68 5498.08,5404.04 5498.08,6265.25 5712.87,6480.04 5713.82,6481.27 5714.42,6482.71 5714.62,6484.25 5714.62,6744.1 5714.42,6745.64 5713.82,6747.07 5712.87,6748.31 5464.84,6996.34 5450.84,7010.34 5450.84,7084.6 6696.44,7084.6
VCC1V8 on VCCINT (split plane): 6696.44,4454.78 6137.8,4454.78 6136.26,4454.57 6135.24,4454.15 6134.82,4453.98 6133.58,4453.03 6094.21,4413.66 6093.27,4412.43 6092.67,4410.99 6092.47,4409.45 6092.47,4273.67 5998.53,4273.67 5946.9,4325.3 5946.9,5326.77 5946.9,5350.39 5946.7,5351.94 5946.1,5353.37 5945.16,5354.61 5765.8,5533.96 5765.8,6092.02 6026.09,6352.31 6080.21,6352.31 6106.03,6326.5 6107.26,6325.55 6108.7,6324.96 6110.24,6324.75 6299.21,6324.75 6300.76,6324.96 6302.19,6325.55 6303.43,6326.5 6620.58,6643.65 6696.44,6643.65

## Keep-outs
Top Layer:
  circle w10: c4121.01,7648.97 r98.43
  circle w10: c6388.72,4121.41 r98.43
Bottom Layer:
  circle w10: c4121.01,7648.97 r98.43
  circle w10: c6388.72,4121.41 r98.43
  rectangle: 6110.24,7377.95 6307.09,7472.44
Keep-Out Layer:
  the board outline again, w31.5

## Other copper
Bottom Layer:
  region: 6200.79,5110.24 6255.91,5110.24
VCCINT (plane layer: these items are gaps in the copper):
  lines w11.81: 3996.02,5956.69 4547.25,5956.69 4547.25,5834.65 4393.7,5834.65 ; 4374.02,5822.84 4393.7,5834.65 ; 5460.63,6992.13 5444.88,7007.87 ; 5673.23,3999.96 5673.23,5220.47 5492.13,5401.58 5492.13,6267.72 5708.66,6484.25 5708.66,6744.1 5444.88,7007.87 ; 5673.23,4334.65 5472.44,4334.65 5429.14,4334.65 5429.14,5090.55 5271.65,5248.03 5271.65,5956.69 5212.6,5956.69 4925.2,5956.69 4925.2,5834.65 5086.62,5834.65 5129.92,5791.34 5129.92,5775.59 5090.55,5736.22 5090.55,5106.3 5114.17,5082.68 5114.17,5003.94 4929.14,5003.94 4885.83,4960.63 4885.83,4795.28 4700.79,4795.28 4700.79,4921.26 4618.11,5003.94 4350.4,5003.94 4350.4,5074.8 4381.89,5106.3 4381.89,5736.22 4342.52,5775.59 4342.52,5783.47 4393.7,5834.65 ; 6715.8,4448.82 6137.8,4448.82 6098.43,4409.45 6098.43,4267.72 5996.06,4267.72 5940.95,4322.84 5940.95,5326.77 5940.95,5350.39 5759.84,5531.5 5759.84,6094.49 6023.62,6358.27 6082.68,6358.27 6110.24,6330.71 6299.21,6330.71 6618.11,6649.61 6715.8,6649.61 ; 6715.8,7090.55 5984.25,7090.55 5814.96,7090.55 5444.88,7090.55 5444.88,7007.87

## Silkscreen, mask and mechanical layers (free items; w line width, h text height)
Top Overlay:
  circle w5: c6559.06,6874.02 r98.43
  circle w5: c4157.48,5338.58 r98.43
  circle w5: c6559.06,4157.48 r62.99
  circle w5: c4157.48,5338.58 r62.99
  circle w5: c4157.48,5338.58 r108.27
  circle w5: c6559.06,6874.02 r62.99
  circle w5: c6559.06,6874.02 r108.27
  circle w10: c6244.1,5240.16 r106.3
  circle w10: c6216.54,4901.58 r106.3
  circle w10: c5090.55,6952.76 r98.43
  lines w3.15: 5724.41,7259.84 5929.14,7259.84 5960.63,7291.34 ; 5732.28,7330.71 6039.37,7330.71 6078.74,7291.34 ; 6078.74,7330.71 6157.48,7330.71 6196.85,7291.34 ; 6314.96,7291.34 6354.33,7330.71 6460.63,7330.71 ; 6673.23,5681.1 6688.98,5696.85 6688.98,5870.08
  lines w5: 4000,4049.21 4039.37,4049.21 4043,4048.52 4046.33,4046.33 4048.52,4042.99 4049.21,4039.37 4049.21,4000 ; 4000,4059.06 4059.06,4059.06 4059.06,4000 ; 4000,5491.14 4078.74,5491.14 4082.37,5491.83 4085.7,5494.02 4087.89,5497.36 4088.58,5500.98 4088.58,5530.51 4087.89,5534.14 4085.7,5537.47 4082.37,5539.66 4078.74,5540.35 4000,5540.35 ; 4000,6972.44 4059.06,6972.44 4059.06,7027.56 ; 4000,6992.13 4039.37,6992.13 4043,6992.82 4046.33,6995.01 4048.52,6998.34 4049.21,7001.97 4049.21,7025.59 ; 4000.05,7015.75 cw(c5358.29,1236.19) 6716.54,7015.75 ; 4000.05,7094.49 cw(c5358.29,1314.93) 6716.54,7094.49 ; 4000.34,4859.8 4090.89,4859.8 4090.89,4934.61 4000.37,4934.61 ; 4000.34,6092.09 4090.89,6092.09 4090.89,6166.89 4000.37,6166.89 ; 4118.11,5338.58 4157.48,5338.58 ; 4157.48,5299.21 4157.48,5338.58 ; 4157.48,5377.95 4157.48,5338.58 ; 4196.85,5338.58 4157.48,5338.58 ; 4618.11,7125.98 4618.11,7074.8 4669.29,7074.8 4669.29,7129.92 ; 4723.43,7136.81 4723.43,7081.1 4724.12,7077.48 4726.31,7074.14 4729.65,7071.95 4733.27,7071.26 4762.8,7071.26 4766.42,7071.95 4769.76,7074.14 4771.95,7077.48 4772.64,7081.1 4772.64,7142.72 ; 4728.35,4216.54 4767.72,4216.54 ; 4767.72,4177.17 4767.72,4216.54 ; 4767.72,4255.91 4767.72,4216.54 ; 4807.09,4216.54 4767.72,4216.54 ; 5909.45,4216.54 5948.82,4216.54 ; 5943.9,7142.72 5943.9,7081.1 5944.59,7077.48 5946.78,7074.14 5950.12,7071.95 5953.74,7071.26 5983.27,7071.26 5986.89,7071.95 5990.23,7074.14 5992.42,7077.48 5993.11,7081.1 5993.11,7136.81 ; 5948.82,4177.17 5948.82,4216.54 ; 5948.82,4255.91 5948.82,4216.54 ; 5956.69,7141.73 5956.69,7098.43 6007.87,7098.43 6007.88,7137.8 ; 5988.19,4216.54 5948.82,4216.54 ; 6457.32,4194.51 cw(c6559.06,4157.48) 6482.5,4080.92 ; 6466.57,4191.14 cw(c6559.06,4157.48) 6483.66,4094.21 ; 6519.69,4157.48 6559.06,4157.48 ; 6519.69,6874.02 6559.06,6874.02 ; 6559.06,4118.11 6559.06,4157.48 ; 6559.06,4196.85 6559.06,4157.48 ; 6559.06,6834.65 6559.06,6874.02 ; 6559.06,6913.39 6559.06,6874.02 ; 6598.43,4157.48 6559.06,4157.48 ; 6598.43,6874.02 6559.06,6874.02 ; 6657.48,4000 6657.48,4059.06 6716.54,4059.06 ; 6657.48,7027.56 6657.48,6972.44 6716.54,6972.44 ; 6667.32,4000 6667.32,4039.37 6668.02,4042.99 6670.21,4046.33 6673.54,4048.52 6677.17,4049.21 6716.54,4049.21 ; 6667.32,7025.59 6667.32,7001.97 6668.02,6998.34 6670.21,6995.01 6673.54,6992.82 6677.17,6992.13 6716.54,6992.13 ; 6716.51,4862.2 6625.98,4862.2 6625.98,4937.01 6716.54,4937.01 ; 6716.54,5491.14 6637.8,5491.14 6634.17,5491.83 6630.84,5494.02 6628.65,5497.36 6627.95,5500.98 6627.95,5530.51 6628.65,5534.14 6630.84,5537.47 6634.17,5539.66 6637.8,5540.35 6716.54,5540.35 ; 6716.85,6094.49 6626.33,6094.49 6626.33,6169.29 6716.88,6169.29 ; 4728.35,4177.17 cw(c4728.35,4216.54) 4728.35,4255.91 4807.09,4255.91 cw(c4807.09,4216.54) 4807.09,4177.17 4728.35,4177.17 ; 5909.45,4177.17 cw(c5909.45,4216.54) 5909.45,4255.91 5988.19,4255.91 cw(c5988.19,4216.54) 5988.19,4177.17 5909.45,4177.17
  text "LH79520 EXT DEBUG" at 5720.47,7779.53 h31.5
  text "OPEN: INTEGRATED" at 5267.72,7318.9 h31.5 r90
  text "CLOSED: EXTERNAL" at 5311.02,7318.9 h31.5 r90
  text "LH79520 DEBUG SELECT" at 5220.47,7263.78 h31.5 r90
  text "EXT DEBUG" at 6409.45,7169.29 h31.5
  text "ALL" at 5051.18,6980.32 h31.5
  text "4k7" at 5047.25,6933.07 h31.5
  text "ALL" at 6204.73,5255.91 h31.5
  text "100nF" at 6196.85,5208.66 h31.5
  text "ALL" at 6192.91,4913.39 h31.5
  text "10nF" at 6200.79,4866.14 h31.5
  text "LOADED" at 4681.1,4066.93 h31.5
  text "POWER" at 5889.77,4066.93 h31.5
Bottom Overlay:
  drawing of 888 lines, arcs and shapes, not listed
  text "NBP#28" at 6376.91,7715.89 h31.5
  text "REV 1.00" at 6046.21,7711.96 h31.5
  text "1" at 4550,6300 h31.5
  text "1" at 4542.27,4345.82 h31.5
PCB Boundary:
  the board outline again, w9.84
  text "PCB boundary coincides with centre-line of tracks and arc" at 4000,3527.56 h31.5
Gerber ID:
  text ".Printout_Name" at 4000,3763.78 h31.5
Printout ID:
  text ".Printout_Name" at 4000,3606.3 h31.5